# Altium PCB Layout.PcbDoc
Units mm, origin at the board's own origin, x right, y up, seen from the top; angles counter-clockwise.
Board outline 99.27 x 99.28 mm, 2 copper layers (Top Layer, Bottom Layer); 55 components, 56 nets, 260 pads, 29 vias.
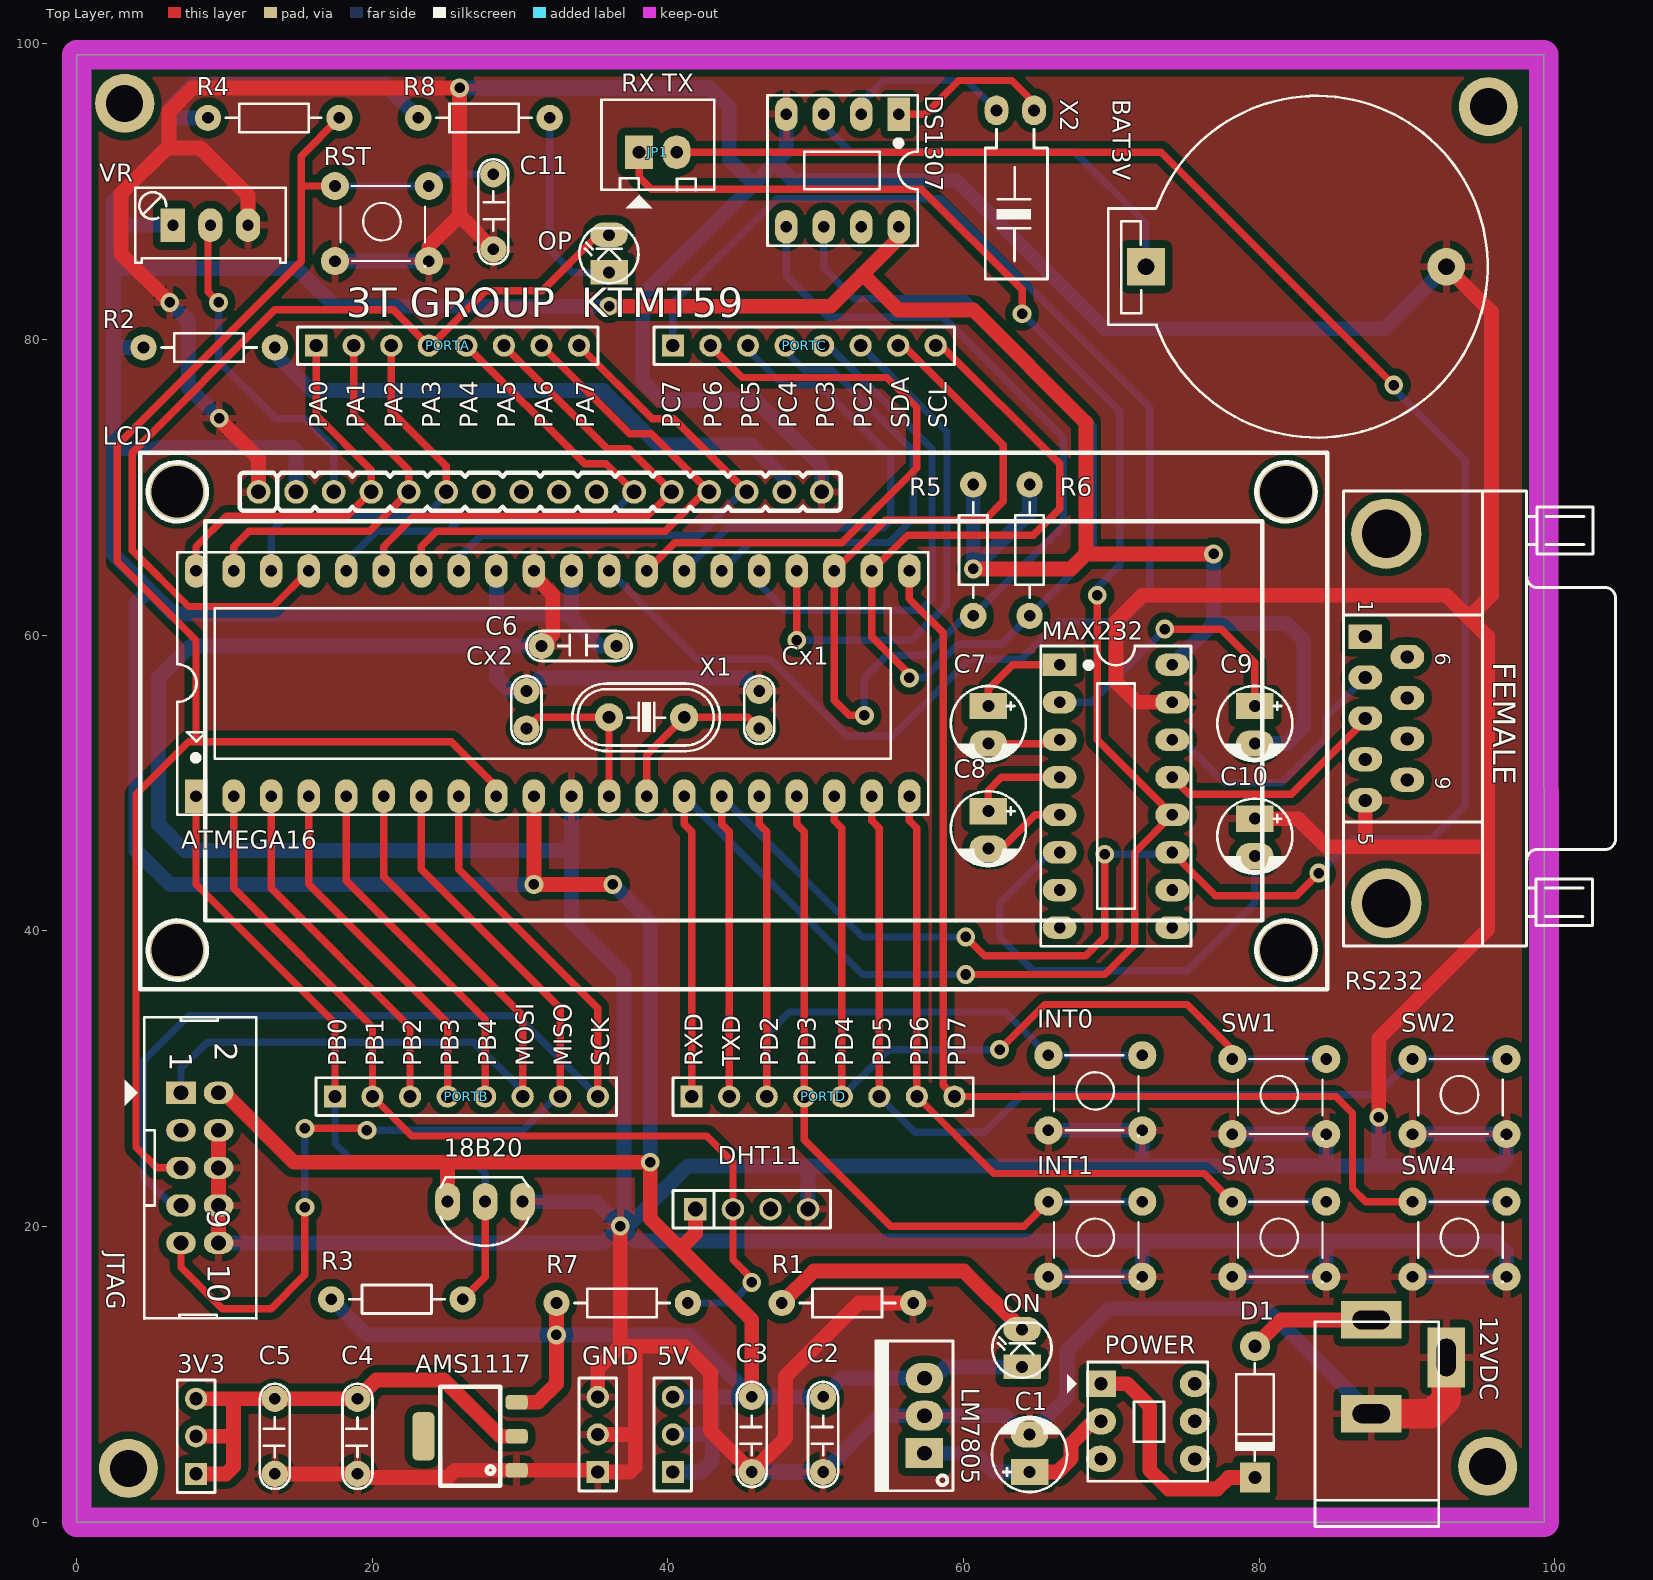
[diagram p0: Top Layer view]
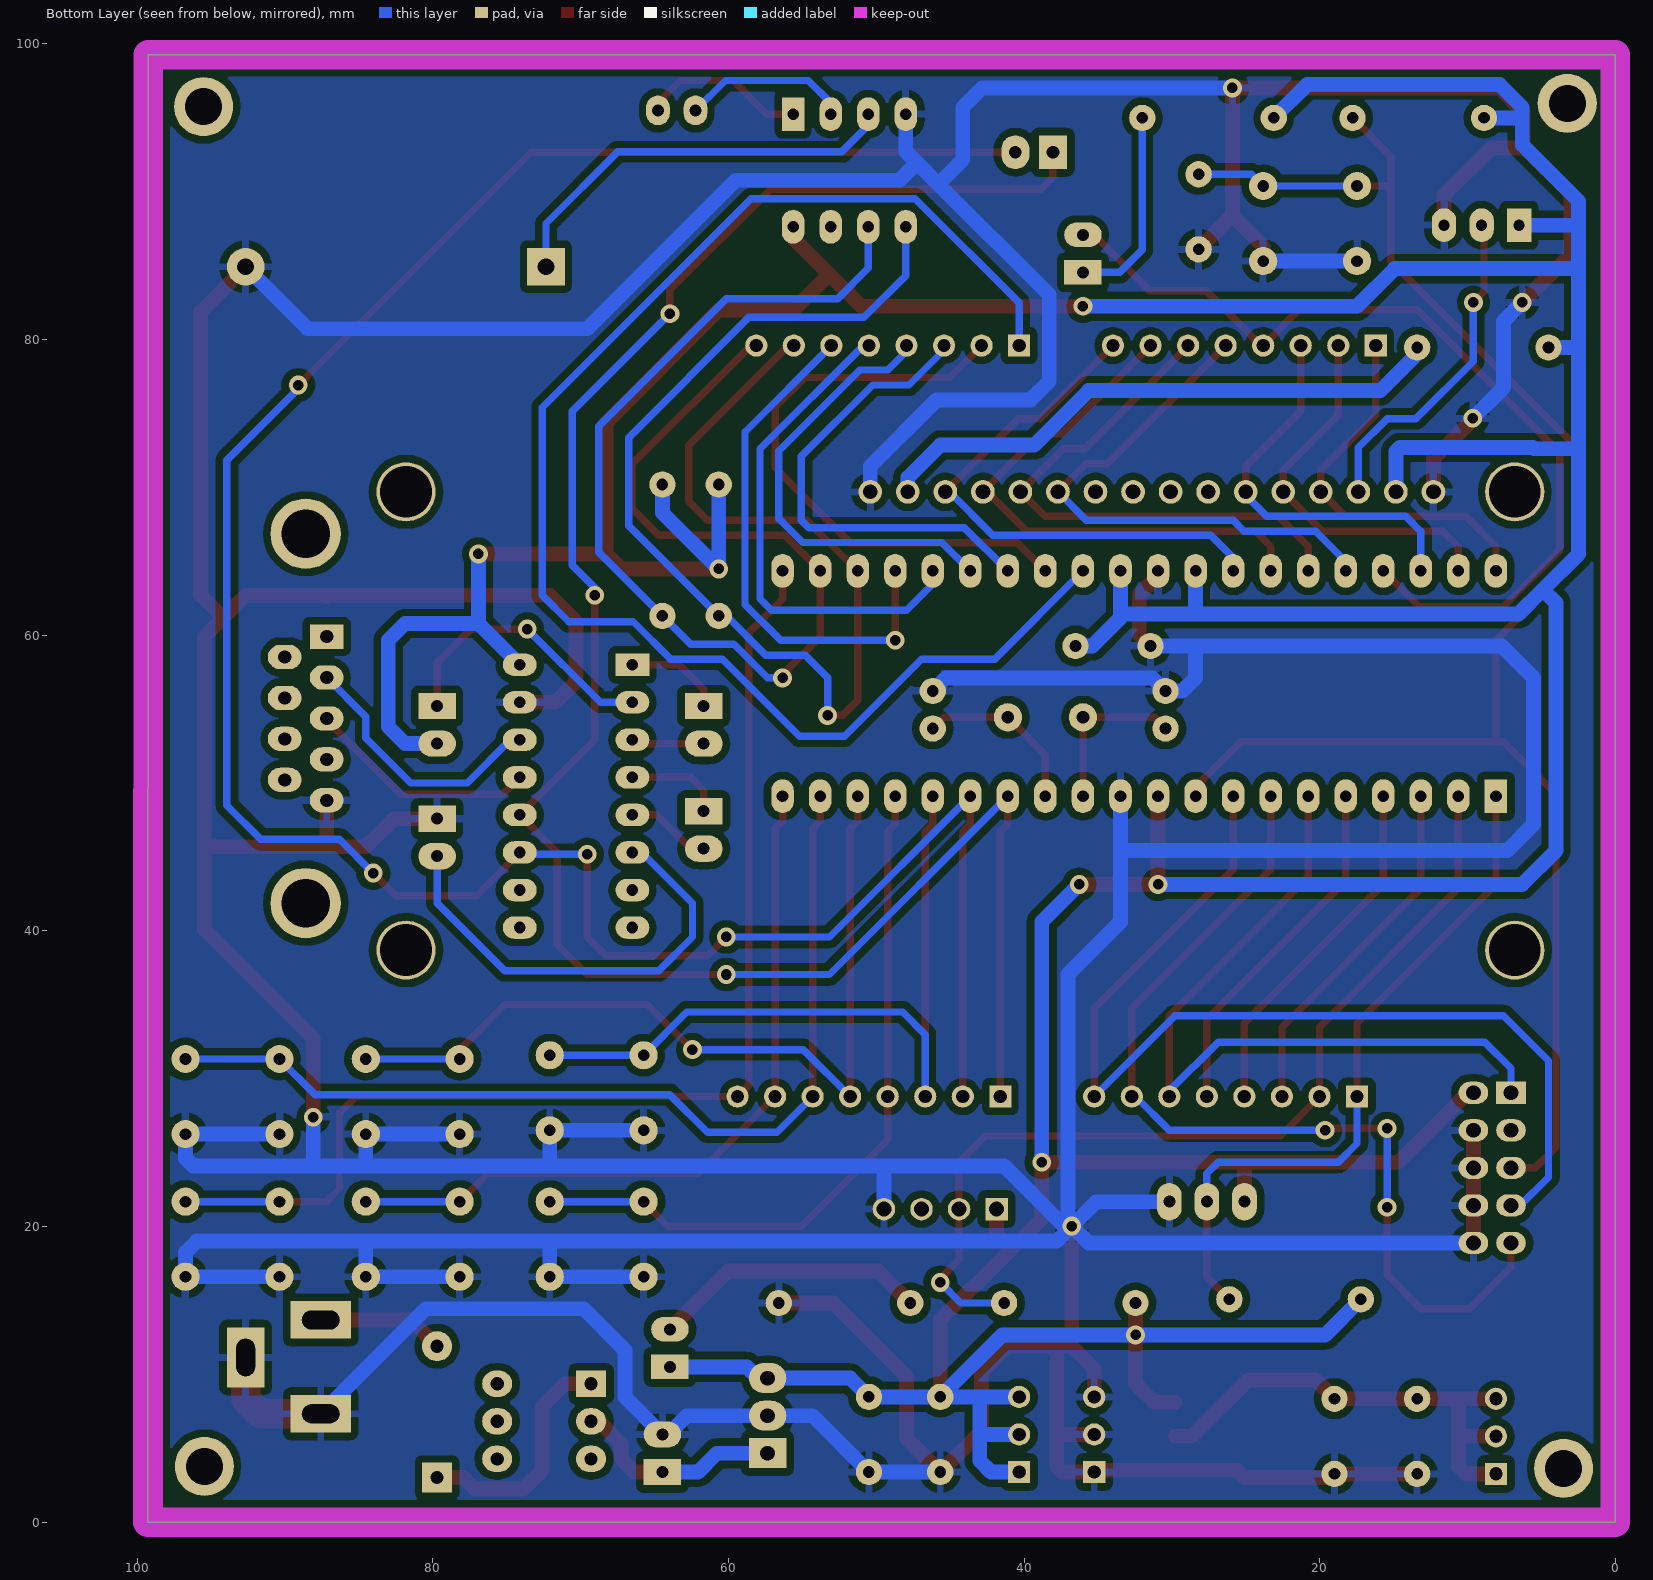
[diagram p1: Bottom Layer view, seen from below]
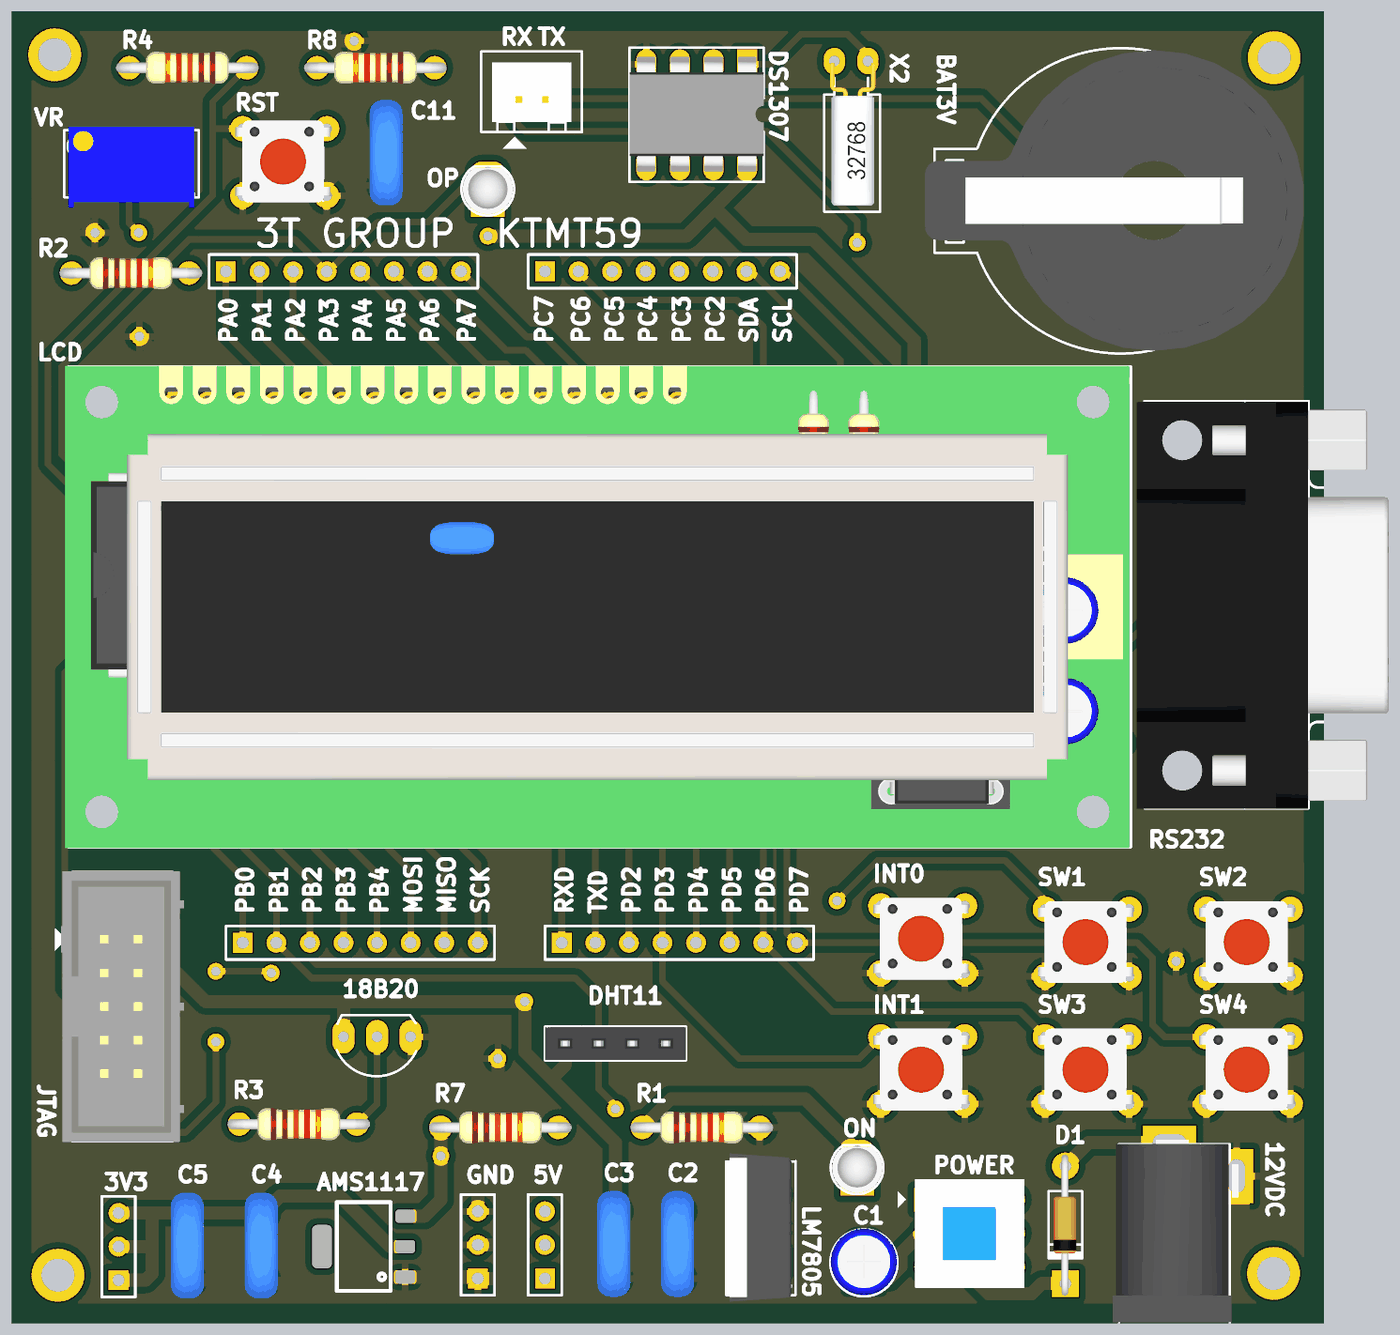
[diagram p2: 3D render of the assembled board from above, using the file's embedded part models]

## Layer stack, top to bottom
Top Solder: solder mask 0.0102, Solder Resist, Dk 3.5
Top Layer: signal copper 0.0356
Dielectric 1: dielectric 0.32, FR-4, Dk 4.8
Bottom Layer: signal copper 0.0356
Bottom Solder: solder mask 0.0102, Solder Resist, Dk 3.5

## Board outline
0,0 0,99.28 99.258,99.28 99.269,0

## Design rules (kind name [scope] priority, off if disabled: settings)
Clearance [All] p1: gap=0.5 ignorepadtopadclearanceinfootprint=FALSE
PlaneClearance [All] p1: clearance=0.5
PlaneConnect [All] p1: planeconnectstyle=Relief reliefexpansion=0.5 reliefentries=4 reliefconductorwidth=0.5 reliefairgap=0.5
PolygonConnect [All] p1: connectstyle=Relief reliefconductorwidth=0.5 reliefentries=4 polygonreliefangle="90 Angle" airgapwidth=0.5
RoutingVias [All] p1: holewidth=0.711 width=1.27 viastyle="Through Hole" minholewidth=0.711 minwidth=1.27 maxholewidth=0.711 maxwidth=1.27
SolderMaskExpansion [All] p1: expansion=0.102
Width Net_Signal [InNetClass('Net_Signal')] p1: maxlimit=1 minlimit=0.5 preferedwidth=0.5
Width Net_Power [InNetClass('Net_Power')] p2: maxlimit=2 minlimit=0.5 preferedwidth=1
28 further rules are at their usual default settings.

## Classes and differential pairs
net class Net_Signal: MISO MOSI Net12VDC_1 NetBAT3V_1 NetC1_1 NetC7_1 NetC7_2 NetC8_1 NetC8_2 NetC9_1 NetC10_2 NetD1_2 NetDS1307_1 NetDS1307_2 NetLCD_3 NetLCD_15 NetMAX232_13 NetMAX232_14 NetON_2 NetOP_1 PA0 PA1 PA2 PA3 PA4 PA5 PA6 PA7 PB0 PB1 PB2 PB3 PB4 PC2 PC3 PC4 PC5 PC6 PC7 PD2 PD3 PD4 PD5 PD6 PD7 RESET RXD SCK SCL SDA TXD XTAL1 XTAL2
net class Net_Power: 3V3 GND VCC

## Components (designator, comment, footprint, x,y, rotation, side; value= is the part's Value field where it differs from the comment)
3V3 "Header 3" HDR1X3 8.08,3.268 r90 top
5V "Header 3" HDR1X3 40.338,3.395 r90 top
12VDC "Jac DC" DC-IN 90.122,10.507 r90 top
18B20 "DS18B20" DS18S20 27.638,21.683 r180 top
AMS1117 "AMS1117-3V3" AMS1117-3.3V 26.622,5.808 r180 top
ATMEGA16 "ATMEL 16" DIP40/W0.6 8.08,49.115 r0 top value="Atmega 16L"
BAT3V "PIN 3V" PIN3V 72.342,84.929 r0 top (schematic designator BT1)
C1 "100uF" CP1/2 64.468,3.395 r90 top value=10uF/50V
C2 "106" CN2 50.498,3.395 r90 top value=0.1uF
C3 "104" CN2 45.672,3.395 r90 top value=0.1uF
C4 "106" CN2 19.002,3.268 r90 top value=0.1uF
C5 "104" CN2 13.414,3.268 r90 top value=0.1uF
C6 "104" CN2 31.448,59.275 r0 top value=0,1uF/300V
C7 "1uF" CP1/2 61.674,55.211 r270 top value=10uF/50V
C8 "1uF" CP1/2 61.674,48.099 r270 top value=10uF/50V
C9 "1uF" CP1/2 79.708,55.211 r270 top value=10uF/50V
C10 "1uF" CP1/2 79.708,47.591 r270 top value=10uF/50V
C11 "104" CN2 28.194,91.186 r270 top value=0.1uF
Cx1 "22pF" CN1 46.18,56.227 r270 top value=33pF
Cx2 "22pF" CN1 30.432,56.227 r270 top value=33pF
D1 "1N4007" D1A 79.708,11.904 r90 top
DHT11 "DHT11" JP4-C1T 41.862,21.175 r0 top
DS1307 "DS1307" DIP8/W0.3 55.626,95.25 r180 top
GND "Header 3" HDR1X3 35.258,3.395 r90 top
INT0 "SW" SW4 65.738,31.589 r0 top value="Button chip 4 pin"
INT1 "SW" SW4 65.738,21.683 r0 top value="Button chip 4 pin"
JP1 "JP2" CON2 38.052,92.676 r0 top value="Connector 2"
JTAG "Header 5x2" Hed2X5 7.064,29.049 r270 top
LCD "LCD 16x2A" LCD16x2 12.31,69.701 r0 top value=LCD16x2A
LM7805 "LM7805" QTO-220 57.356,4.665 r90 top
MAX232 "MAX232" DIP16/W0.3 66.5,58.005 r270 top
ON "LED" LED-3 63.96,10.507 r90 top value="LED 3 ly Single Colour"
OP "LED" LED-3 36.02,84.548 r90 top value="LED 3 ly Single Colour"
PORTA "Header 8" HDR1X8 16.208,79.595 r0 top
PORTB "Header 8" HDR1X8 17.478,28.795 r0 top
PORTC "Header 8" HDR1X8 40.338,79.595 r0 top
PORTD "Header 8" HDR1X8 41.608,28.795 r0 top
POWER "SW6S" SW6 69.294,9.364 r0 top value=SW6 (schematic designator PWR)
R1 "220" R1/4W 56.594,14.825 r180 top value="R1/4W - 1K"
R2 "220" R1/4W 13.414,79.468 r180 top value="R1/4W - 1K"
R3 "10k" R1/4W 26.114,15.079 r180 top value="R1/4W - 1K"
R4 "100k" R1/4W 8.89,94.996 r0 top value="R1/4W - 1K"
R5 "10k" R1/4W 60.658,61.307 r90 top value="R1/4W - 1K"
R6 "10k" R1/4W 64.468,61.307 r90 top value="R1/4W - 1K"
R7 "10k" R1/4W 41.354,14.825 r180 top value="R1/4W - 1K" (schematic designator R17)
R8 "330" R1/4W 23.114,94.996 r0 top value="R1/4W - 1K"
RS232 "RS232" "DSB 9-F" 88.598,54.371 r270 top
RST "SW" SW4 17.478,90.39 r0 top value="Button chip 4 pin"
SW1 "SW" SW4 78.184,31.335 r0 top value="Button chip 4 pin"
SW2 "SW" SW4 90.376,31.335 r0 top value="Button chip 4 pin"
SW3 "SW" SW4 78.184,21.683 r0 top value="Button chip 4 pin"
SW4 "SW" SW4 90.376,21.683 r0 top value="Button chip 4 pin"
VR "10K" VR1 6.514,87.74 r0 top value="VR 10K"
X1 "16MHz" XT2 38.56,54.449 r0 top value=4Mhz
X2 "32,768 Khz" XT32-2 64.77,95.504 r270 top value=32,768khz

## Footprints (in the part's own frame and the unit in brackets; to place one, negate y for a bottom-side part, rotate by r counter-clockwise, add the part's x,y. Pads: shape width x height; smd on the part's side, far side on the other; paste and mask are expansions set on the pad)
AMS1117-3.3V [mm] "SOT223, 4-Leads, Body 6.7x7.3mm (max), Pitch 2.30mm, IPC Medium Density"
  rrect50% 1.5x1 smd: 1(-3.15,2.3) 2(-3.15,0) 3(-3.15,-2.3)
  rrect50% 1.5x3.28 smd: 4(3.15,0)
  silkscreen extent -2.03,-3.35 2.03,3.35
CN1 [mil]
  round 70 hole 31: 1(0,0) 2(100,0)
  silkscreen extent -40,-40 141,40, body extent -60,-30 170,37, height 265
CN2 [mil]
  round 70 hole 31: 1(0,0) 2(200,0)
  silkscreen extent -40,-40 240,40, body extent -54,-44 260,55, height 407
CON2 [mil] "CON2"
  rect 75x90 hole 34: 1(0,0)
  oval 75x90 hole 34: 2(100,0)
  silkscreen extent -100,-150 200,140, body extent -68,-70 168,107, height 236
CP1/2 [mil] "Tu hoa < 22uF/16>50V"
  rect 70x100 hole 32: 1(0,0)
  oval 70x100 hole 32: 2(100,0)
  silkscreen extent -53,-100 146,100, body extent -49,-99 149,99, height 287
D1A [mil] "Diode 1A, W 100mil, L 350mil"
  round 80 hole 35: 1(0,0)
  rect 80x80 hole 35: 2(-350,0)
  silkscreen extent -305,-50 -45,50, body extent -386,-33 34,36, height 84
DC-IN [mil] "Jac DC input"
  rect 100x160 hole 50 slot 100 at 90 deg: 1(125,100) 2(-125,100)
  rect 160x100 hole 50 slot 100 at 0 deg: 3(25,-100)
  silkscreen extent -425,-80 120,250, body extent -410,-105 134,269, height 434
DIP8/W0.3 [mil] "8 PIN, W 300mil, Pin to pin 100mil"
  rect 60x90 hole 31: 1(0,0)
  oval 60x90 hole 31: 2(100,0) 3(200,0) 4(300,0) 5(300,300) 6(200,300) 7(100,300) 8(0,300)
  silkscreen extent -50,-50 350,350, body extent -50,-40 350,336, height 201
DIP16/W0.3 [mil] "16 PIN, W 300mil, Pin to pin 100mil"
  rect 60x90 hole 31: 1(0,0)
  oval 60x90 hole 31: 2(100,0) 3(200,0) 4(300,0) 5(400,0) 6(500,0) 7(600,0) 8(700,0) 9(700,300) 10(600,300) 11(500,300) 12(400,300) 13(300,300) 14(200,300) 15(100,300) 16(0,300)
  silkscreen extent -50,-50 750,350, body extent -52,-57 752,356, height 299
DIP40/W0.6 [mil] "40 PIN, W 600mil, Pin to pin 100mil"
  rect 60x90 hole 31: 1(0,0)
  oval 60x90 hole 31: 2(100,0) 3(200,0) 4(300,0) 5(400,0) 6(500,0) 7(600,0) 8(700,0) 9(800,0) 10(900,0) 11(1000,0) 12(1100,0) 13(1200,0) 14(1300,0) 15(1400,0) 16(1500,0) 17(1600,0) 18(1700,0) 19(1800,0) 20(1900,0) 21(1900,600) 22(1800,600) 23(1700,600) 24(1600,600) 25(1500,600) 26(1400,600) 27(1300,600) 28(1200,600) 29(1100,600) 30(1000,600) 31(900,600) 32(800,600) 33(700,600) 34(600,600) 35(500,600) 36(400,600) 37(300,600) 38(200,600) 39(100,600) 40(0,600)
  silkscreen extent -50,-50 1950,650, body extent -82,-10 1982,600, height 224
DS18S20 [mil] "TO-92"
  oval 66x100 hole 32: 3(100,0) 4(0,0) 5(-100,0)
  silkscreen extent -117,-65 120,118
"DSB 9-F" [mil] "COM FMALE - D Subminiature; 9 Position; Right Angle; Pitch 1.385 mm"
  rect 65x90 hole 35: 1(-218.11,-55.91)
  oval 65x90 hole 35: 2(-109.05,-55.91) 3(0,-55.91) 4(109.05,-55.91) 5(218.11,-55.91) 6(-163.58,55.91) 7(-54.53,55.91) 8(54.53,55.91) 9(163.58,55.91)
  round 187.4 hole 128.35: 10(-491.93,0) 11(491.93,0)
  silkscreen extent -606,-114 606,610, body extent -604,-138 608,613, height 495
HDR1X3 [mm] "Connector; Header; 3 Position"
  rect 1.5x1.5 hole 0.9: 1(0,0)
  round 1.5 hole 0.9: 2(2.54,0) 3(5.08,0)
  silkscreen extent -1.27,-1.27 6.35,1.27
HDR1X8 [mm] "Connector; Header; 8 Position"
  rect 1.5x1.5 hole 0.9: 1(0,0)
  round 1.5 hole 0.9: 2(2.54,0) 3(5.08,0) 4(7.62,0) 5(10.16,0) 6(12.7,0) 7(15.24,0) 8(17.78,0)
  silkscreen extent -1.27,-1.27 19.05,1.27
Hed2X5 [mm] "Header 10x2,20 pin, connecter"
  rect 1.5x2 hole 1: 1(0,0)
  oval 1.5x2 hole 1: 2(0,2.54) 3(2.54,0) 4(2.54,2.54) 5(5.08,0) 6(5.08,2.54) 7(7.62,0) 8(7.62,2.54) 9(10.16,0) 10(10.16,2.54)
  silkscreen extent -5.1,-3.81 15.29,5.11, body extent -5.17,-3.33 15.33,5.97, height 8.82
JP4-C1T [mm] "4 row, straight, gold plating"
  rect 1.52x1.52 hole 1.02: 1(0,0)
  round 1.52 hole 1.02: 2(2.54,0) 3(5.08,0) 4(7.62,0)
  silkscreen extent -1.52,-1.27 9.14,1.27, body extent -1.52,-1.25 9.14,1.25, height 8.51
LCD16x2 [mm] "LCD 16x2, 36.3mmx80.3mm"
  round 1.6 hole 1 mask+0.1: 1(0,0) 2(2.54,0) 3(5.08,0) 4(7.62,0) 5(10.16,0) 6(12.7,0) 7(15.24,0) 8(17.78,0) 9(20.32,0) 10(22.86,0) 11(25.4,0) 12(27.94,0) 13(30.48,0) 14(33.02,0) 15(35.56,0) 16(38.1,0)
  round 4 hole 3.5: Hole_0(-5.5,0) Hole_1(-5.5,-31) Hole_3(69.5,-31) Hole_4(69.5,0)
  silkscreen extent -8,-33.65 72.3,2.65, body extent -8.25,-33.75 72.25,2.75, height 10.52
LED-3 [mil] "LED 2 PIN, 3ly Only colour"
  rect 65x100 hole 32: 1(0,0)
  oval 65x100 hole 32: 2(100,0)
  silkscreen extent -29,-78 118,79, body extent -25,-75 113,75, height 217
PIN3V [mil] "Socket PIN 3V"
  rect 100x100 hole 45: 1(0,0)
  round 100 hole 45: 2(800,0)
  silkscreen extent -100,-455 910,455, body extent -128,-447 1002,449, height 278
QTO-220 [mil] "TO-220 - 1-2-3"
  rect 80x100 hole 39: 1(0,0)
  oval 80x100 hole 39: 2(100,0) 3(200,0)
  silkscreen extent -100,-76 300,130, body extent -119,-64 322,121, height 755
R1/4W [mil] "R 1/4W, 2 Pin, 350mil"
  round 70 hole 31: 1(0,0) 2(350,0)
  silkscreen extent 48,-38 302,38, body extent -40,-47 386,47, height 111
SW4 [mil] "SW button 4pin, 250 x250 mil"
  round 75 hole 31: 1(0,0) 2(250,-200) 3(250,0) 4(0,-200)
  silkscreen extent 15,-215 240,0, body extent -36,-220 276,24, height 276
SW6 [mil] "SW DTDP - 6Pin 260x300x300 mil"
  rect 80x70 hole 35: 1(0,0)
  oval 80x70 hole 35: 2(0,-100) 3(0,-200) 4(250,-200) 5(250,-100) 6(250,0)
  silkscreen extent -90,-260 285,58, body extent -33,-259 281,55, height 532
VR1 [mil] "Variable Resistor"
  rect 65x90 hole 30: 1(0,0)
  oval 65x90 hole 30: 2(100,0) 3(200,0)
  silkscreen extent -100,-100 301,100, body extent -88,-130 288,110, height 455
XT2 [mil] "Footpin for Crystal 2 pin"
  round 75 hole 34: 1(-100,0) 2(100,0)
  silkscreen extent -198,-90 195,90, body extent -233,-93 213,90, height 138
XT32-2 [mm] "Crystal 32k, 2 pin, real timer for DS1307"
  oval 2x1.6 hole 0.813: 1(0,0) 2(0,-2.54)
  silkscreen extent 1.27,-3.3 11.4,0.91, body extent 0.15,-2.87 10.92,0.58, height 3.4

## Part data
3V3 5V GND: library part Hed3, "Header 3 (Green)"
12VDC: library part DCIN, "Jac DC input"
18B20: library part DS18S20, "High Precision  1-Wire® Digital Thermometer"
AMS1117: "Linear Voltage Regulator 3.3V 1A 15V Max SOT-223", ComponentLink1Description=Datasheet, ComponentLink1URL="D:\Dropbox\Datasheets\Power Management ICs\Linear Regulators\AMS1117.pdf", Unit Price=0.2000
ATMEGA16: library part ATmega16A-PU, "8-Bit AVR Microcontroller with 16K Bytes of In-System Programmable Flash Memory"
BAT3V: "Battery 3VDC"
C1 C7 C8 C9 C10: library part CP1, "Cap P  0,1uF < 22uF , 16 - 50V", Description 1="10 => 220uF/6,3V/10V - 10uF => 100uF/16V", Description 2="0,1uF => 33uF/50V - 10uF => 22uF/63V", Description 3="0,47uF => 10uF/100V"
C2 C3 C4 C5 C11: library part CN2, "Cap np 104 => 105pF"
C6: library part CN, Designed by=VanDungEvn
Cx1 Cx2: library part CN0, "Cremic For Xtal 1pF => 100pF"
D1: library part D1A, "Diode 1A"
DHT11: Manufacturer="Würth Elektronik eiSos GmbH", partNo=613004143121, ComponentLink1 Description=Manufacturer, ComponentLink1URL=http://www.we-online.com, ComponentLink2 Description=Datasheet, ComponentLink2URL=http://katalog.we-online.de/em/datasheet/6130xx143121.pdf, Created by="Karrer Zheng", Created Date="29 March 2013", NoPins=04
DS1307: "Real Timer Serial"
INT0 INT1 RST SW1 SW2 SW3 SW4: library part SW4, "Switch button 4 pin"
JP1: library part Con2, "Connector 2"
JTAG: library part HED5x2
LCD: library part LCD16x2A, "LCD dipslay 16 char, 2 line"
LM7805: library part LM78xx, "On ap +, from + 5 to + 24VDC", =LM7808
MAX232: "Dual EIA-232 Driver/Receiver"
ON OP: "LED Single colour Green and Red"
PORTA PORTB PORTC PORTD: library part HED8V, "Header 8 Vit Broad"
POWER: "SW-DTDP - 6 Pin"
R1 R2 R3 R4 R5 R6 R7 R8: library part R1/4W, "Resistor 1/4W"
RS232: library part COM
VR: library part VR, "Var Resistor"
X1: library part XT2, "Crystal For all Crystal 2pin."
X2: library part XT32k, "Crystal 32,768kHz for timer real"

## Free pads (board coordinates)
  round 4 hole 2.5: 1(3.254,95.978) 2(95.504,95.758) 3(3.5,3.64) 4(95.456,3.776)

## Via types
v1: diameter 1.27, hole 0.711, Top Layer to Bottom Layer, 29 vias

## Nets (pads, with @x,y where several pads share a name; then routed paths per layer and width w, separated by ;. In a path a pad name is that pad's centre, name@x,y a point inside that pad or via, vN(x,y) a via of type N, cw(c..) or ccw(c..) an arc to the next point about the centre after c; other vN are vias at no path point)
3V3: 3V3.1 3V3.2 3V3.3 AMS1117.2 C4.2 C5.2 | length 33.7
  Top Layer w1: 3V3.1 10.112,3.268 10.62,3.776 10.62,5.808 ; 3V3.2 10.62,5.808 ; 3V3.3 10.62,8.348 ; AMS1117.2 28.654,5.808 24.844,9.618 20.272,9.618 C4.2 C5.2 10.62,8.348 ; 10.62,5.808 10.62,8.348
GND: 12VDC.2 12VDC.3 18B20.5 AMS1117.1 ATMEGA16.11 ATMEGA16.31 BAT3V.2 C1.2 C2.1 C3.1 C4.1 C5.1 C6.1 C10.1 C11.2 Cx1.1 Cx2.1 DHT11.4 DS1307.4 GND.1 GND.2 GND.3 INT0.2 INT0.4 INT1.2 INT1.4 JTAG.4 JTAG.6 JTAG.8 JTAG.10 LCD.1 LCD.16 LM7805.2 MAX232.15 R1.1 RS232.5 RST.2 RST.4 SW1.2 SW1.4 SW2.2 SW2.4 SW3.2 SW3.4 SW4.2 SW4.4 VR.3 | length 800.8
  Top Layer w1: 6.254,92.964 8.382,92.964 11.594,89.752 VR.3 VR.3@11.382,87.952 ; v1(6.302,82.516) 3,85.818 3,89.868 6.254,93.122 6.254,95.422 7.86,97.028 v1(25.908,97.028) 25.908,88.392 ; JTAG.10 JTAG.8 JTAG.6 JTAG.4 ; v1(9.652,74.676) 9.652,74.594 12.31,71.936 LCD.1 ; C5.1 C4.1 19.256,3.014 25.098,3.014 25.592,3.508 AMS1117.1 35.145,3.508 GND.1 37.417,3.395 37.798,3.776 37.798,5.808 ; RST.2 23.828,86.312 25.908,88.392 ; C11.2 25.908,88.392 ; ATMEGA16.31 30.94,64.022 32.21,62.752 32.21,60.037 C6.1 ; GND.2 37.671,5.935 37.798,5.808 ; GND.3 35.258,10.38 36.782,11.904 ; v1(36.782,20.032) 36.782,11.904 ; R1.1 52.911,14.825 47.958,9.872 47.958,5.681 C3.1 42.878,6.189 42.878,10.126 41.1,11.904 37.798,11.904 ; MAX232.15 71.707,55.465 70.31,56.862 70.31,60.926 72.088,62.704 87.074,62.704 ; C10.1 82.629,47.591 84.534,45.686 87.074,45.686 ; RS232.5 87.178,45.79 87.074,45.686 ; 87.178,62.6 87.074,62.704 ; v1(88.09,27.398) 88.09,32.732 95.456,40.098 95.456,45.686 ; BAT3V.2 95.71,81.881 95.71,62.704 94.186,61.18 ; 36.782,11.904 37.798,11.904 ; 37.798,5.808 37.798,11.904 ; 87.074,45.686 95.456,45.686 ; 87.074,62.704 92.662,62.704 94.186,61.18 ; 94.186,61.18 95.456,59.91 95.456,45.686
  Top Layer w2: 12VDC.2 91.646,7.332 92.662,8.348 12VDC.3
  Bottom Layer w1: v1(6.302,82.516) 7.572,81.246 7.572,76.756 v1(9.652,74.676) ; JTAG.10 35.639,18.889 v1(36.782,20.032) ; RST.4 RST.2 ; v1(25.908,97.028) 42.844,97.028 44.148,95.724 44.148,92.168 45.799,90.517 ; 18B20.5 35.131,21.683 v1(36.782,20.032) ; C6.1@31.448,58.894 C6.1 28.4,59.275 ; ATMEGA16.11 33.48,45.432 ; C3.1 C2.1 54.308,7.205 LM7805.2 62.817,7.205 64.087,5.935 C1.2 67.008,8.475 67.008,11.65 69.802,14.444 80.47,14.444 12VDC.2 ; Cx1.1 45.291,57.116 31.321,57.116 Cx2.1 29.289,56.227 28.4,57.116 28.4,59.275 ; DS1307.4 48.006,92.724 47.244,91.962 ; DHT11.4 49.482,24.096 ; LCD.16@50.525,69.816 LCD.16 50.41,71.428 45.926,75.912 39.576,75.912 38.306,77.182 38.306,83.024 45.799,90.517 ; INT1.4 INT1.2 72.088,19.016 ; INT0.4 INT0.2 72.088,24.096 ; SW3.4 SW3.2 84.534,18.762 84.28,19.016 ; SW1.4 SW1.2 84.534,24.096 ; v1(88.09,27.398) 88.09,24.096 ; SW4.4 SW4.2 96.726,18.254 95.964,19.016 84.28,19.016 ; SW2.4 SW2.2 96.726,24.604 96.218,24.096 88.09,24.096 ; BAT3V.2 88.471,80.738 69.548,80.738 59.513,90.773 48.433,90.773 47.244,91.962 ; 28.4,59.275 7.699,59.275 5.54,57.116 5.54,47.21 7.318,45.432 33.48,45.432 ; 33.48,45.432 33.48,40.606 37.036,37.05 37.036,20.286 v1(36.782,20.032) ; v1(36.782,20.032) 37.29,20.032 41.354,24.096 49.482,24.096 ; v1(36.782,20.032) 37.798,19.016 72.088,19.016 ; 45.799,90.517 47.244,91.962 ; 49.482,24.096 72.088,24.096 ; 72.088,19.016 84.28,19.016 ; 72.088,24.096 84.534,24.096 ; 84.534,24.096 88.09,24.096
MISO: ATMEGA16.7 JTAG.9 PORTB.7 | length 64.5
  Top Layer w0.5: JTAG.9 7.064,17.238 9.858,14.444 13.16,14.444 15.446,16.73 v1(15.446,21.302) ; v1(15.446,26.636) 19.51,26.636 v1(19.637,26.509) ; ATMEGA16.7 23.32,44.162 32.718,34.764 PORTB.7
  Bottom Layer w0.5: v1(15.446,21.302) v1(15.446,26.636) ; v1(19.637,26.509) 30.178,26.509 32.464,28.795 PORTB.7
MOSI: ATMEGA16.6 JTAG.1 PORTB.6 | length 51.5
  Top Layer w0.5: ATMEGA16.6 20.78,43.654 30.178,34.256 PORTB.6
  Bottom Layer w0.5: JTAG.1 7.064,30.7 8.842,32.478 26.876,32.478 30.178,29.176 PORTB.6
Net12VDC_1: 12VDC.1 D1.1 | length 8.6
  Top Layer w1: D1.1 81.486,13.682 12VDC.1
NetBAT3V_1: BAT3V.1 DS1307.3 | length 28.2
  Bottom Layer w0.5: DS1307.3 50.546,94.488 52.324,92.71 67.482,92.71 72.342,87.85 BAT3V.1
NetC1_1: C1.1 LM7805.1 POWER.2 | length 14.5
  Top Layer w1: C1.1 66.373,3.395 67.278,4.3 67.278,5.316 68.786,6.824 POWER.2
  Bottom Layer w1: LM7805.1 60.785,4.665 62.055,3.395 C1.1
NetC7_1: C7.1 MAX232.1 | length 6.7
  Top Layer w0.5: C7.1 61.674,56.354 63.325,58.005 MAX232.1
NetC7_2: C7.2 MAX232.3 | length 4.9
  Top Layer w0.5: C7.2 66.246,52.671 MAX232.3
NetC8_1: C8.1 MAX232.4 | length 6.6
  Top Layer w0.5: C8.1 61.674,49.496 62.563,50.385 MAX232.4
NetC8_2: C8.2 MAX232.5 | length 5.8
  Top Layer w0.5: C8.2 62.563,45.559 64.849,47.845 MAX232.5
NetC9_1: C9.1 MAX232.2 | length 19.1
  Top Layer w0.5: v1(73.612,60.418) 77.422,60.418 79.708,58.132 C9.1
  Bottom Layer w0.5: MAX232.2 68.659,55.465 v1(73.612,60.418)
NetC10_2: C10.2 MAX232.6 | length 31.1
  Bottom Layer w0.5: MAX232.6 65.865,45.305 62.436,41.876 62.436,39.59 64.722,37.304 75.136,37.304 79.708,41.876 C10.2
NetD1_2: D1.2 POWER.1 | length 16.2
  Top Layer w1: POWER.1 71.072,9.364 72.596,7.84 72.596,3.522 73.866,2.252 77.168,2.252 77.93,3.014 D1.2
NetDS1307_1: DS1307.1 X2.1 | length 11.2
  Top Layer w0.5: DS1307.1 57.404,95.25 59.684,97.53 63.252,97.53 64.77,96.012 X2.1
NetDS1307_2: DS1307.2 X2.2 | length 11.4
  Bottom Layer w0.5: DS1307.2 53.086,96.012 54.604,97.53 60.204,97.53 X2.2
NetLCD_3: LCD.3 VR.2 | length 22.8
  Top Layer w0.5: VR.2 8.89,87.576 8.89,83.23 v1(9.604,82.516)
  Bottom Layer w0.5: v1(9.604,82.516) 9.604,78.534 13.496,74.642 15.446,74.642 17.39,72.698 LCD.3
NetLCD_15: LCD.15 R2.1 | length 39.3
  Bottom Layer w1: R2.1 13.414,79.042 15.909,76.547 35.639,76.547 39.322,72.864 45.672,72.864 47.87,70.666 LCD.15
NetMAX232_13: MAX232.13 RS232.3 | length 15.6
  Top Layer w0.5: MAX232.13 75.263,49.242 82.176,49.242 RS232.3@87.178,54.244
NetMAX232_14: MAX232.14 RS232.2 | length 18.1
  Bottom Layer w0.5: MAX232.14 74.755,52.925 77.676,50.004 81.486,50.004 84.534,53.052 84.534,54.497 RS232.2
NetON_2: ON.2 R1.2 | length 18.8
  Top Layer w1: R1.2 49.863,16.984 60.023,16.984 ON.2
NetOP_1: OP.1 R8.2 | length 13.6
  Bottom Layer w0.5: R8.2 32.004,86.072 33.528,84.548 OP.1
PA0: ATMEGA16.40 LCD.4 PORTA.1 | length 26.5
  Top Layer w0.5: ATMEGA16.40 8.08,66.006 10.112,68.038 18.267,68.038 LCD.4 19.93,71.174 16.208,74.896 PORTA.1
PA1: ATMEGA16.39 LCD.5 PORTA.2 | length 26.5
  Top Layer w0.5: ATMEGA16.39 10.62,66.006 11.636,67.022 19.791,67.022 LCD.5 22.47,71.174 18.748,74.896 PORTA.2
PA2: ATMEGA16.38 LCD.6 PORTA.3 | length 27.2
  Top Layer w0.5: PORTA.3 21.288,75.15 25.01,71.428 LCD.6
  Bottom Layer w0.5: ATMEGA16.38 13.16,67.022 14.176,68.038 23.574,68.038 25.01,69.474 LCD.6
PA3: ATMEGA16.37 OP.2 PORTA.4 | length 61.5
  Top Layer w0.5: ATMEGA16.37 13.287,61.942 7.572,61.942 3.762,65.752 3.762,72.356 13.414,82.008 21.415,82.008 PORTA.4 23.969,79.595 27.686,83.312 31.496,83.312 35.272,87.088 OP.2
PA4: ATMEGA16.36 LCD.11 PORTA.5 | length 37.5
  Top Layer w0.5: PORTA.5 34.369,71.594 35.817,71.594 LCD.11
  Bottom Layer w0.5: ATMEGA16.36 18.24,64.99 20.272,67.022 25.098,67.022 25.86,67.784 35.793,67.784 LCD.11
PA5: ATMEGA16.35 LCD.12 PORTA.6 | length 39
  Top Layer w0.5: ATMEGA16.35 20.78,66.006 22.812,68.038 38.587,68.038 LCD.12 37.341,72.61 35.893,72.61 PORTA.6
  Bottom Layer w0.5: ATMEGA16.35 ATMEGA16.35@20.78,65.244
PA6: ATMEGA16.34 LCD.13 PORTA.7 | length 38.1
  Top Layer w0.5: ATMEGA16.34 23.32,66.006 24.344,67.03 39.832,67.03 42.503,69.701 LCD.13 38.865,73.626 37.417,73.626 PORTA.7
PA7: ATMEGA16.33 LCD.14 PORTA.8 | length 37.6
  Top Layer w0.5: PORTA.8 38.941,74.642 40.389,74.642 LCD.14
  Bottom Layer w0.5: ATMEGA16.33 25.86,65.244 27.384,66.768 42.116,66.768 45.049,69.701 LCD.14
PB0: 18B20.4 ATMEGA16.1 PORTB.1 R3.1 | length 47.5
  Top Layer w0.5: ATMEGA16.1 8.08,43.146 17.478,33.748 PORTB.1 ; R3.1 27.638,16.603 18B20.4
  Bottom Layer w0.5: PORTB.1 17.478,25.62 18.748,24.35 26.876,24.35 27.638,23.588 18B20.4
PB1: ATMEGA16.2 DHT11.2 PORTB.2 R7.1 | length 64
  Top Layer w0.5: ATMEGA16.2 10.62,42.892 20.018,33.494 PORTB.2 22.685,26.128 42.624,26.128 44.402,24.35 DHT11.2 44.402,17.746 45.672,16.476 v1(45.672,16.222)
  Bottom Layer w0.5: R7.1 44.275,14.825 v1(45.672,16.222)
PB2: ATMEGA16.3 PORTB.3 | length 24.2
  Top Layer w0.5: ATMEGA16.3 13.16,42.892 22.558,33.494 PORTB.3
PB3: ATMEGA16.4 PORTB.4 | length 24.2
  Top Layer w0.5: ATMEGA16.4 15.7,43.146 25.098,33.748 PORTB.4
PB4: ATMEGA16.5 PORTB.5 | length 24.2
  Top Layer w0.5: ATMEGA16.5 18.24,43.4 27.638,34.002 PORTB.5
PC2: ATMEGA16.24 PORTC.6 | length 35.8
  Top Layer w0.5: v1(48.72,59.656) ATMEGA16.24
  Bottom Layer w0.5: v1(48.72,59.656) 56.467,59.656 58.88,62.069 58.88,73.753 PORTC.6
PC3: ATMEGA16.25 PORTC.5 | length 34
  Bottom Layer w0.5: ATMEGA16.25 46.18,63.466 47.958,61.688 57.085,61.688 57.864,62.467 57.864,72.61 50.879,79.595 PORTC.5
PC4: ATMEGA16.26 PORTC.4 | length 30.8
  Bottom Layer w0.5: ATMEGA16.26 45.561,66.276 54.976,66.276 56.594,67.894 56.594,72.466 51.116,77.944 49.228,77.944 47.958,79.214 PORTC.4
PC5: ATMEGA16.27 PORTC.3 | length 33
  Bottom Layer w0.5: ATMEGA16.27 41.117,64.355 44.038,67.276 54.562,67.276 55.07,67.784 55.07,72.102 50.244,76.928 47.786,76.928 45.418,79.296 PORTC.3 PORTC.3@45.799,79.595
PC6: ATMEGA16.28 PORTC.2 | length 41.3
  Top Layer w0.5: ATMEGA16.28 38.571,64.355 40.476,66.26 51.768,66.26 56.848,71.34 56.848,75.404 54.816,77.436 45.037,77.436 PORTC.2 PORTC.2@43.259,79.595
PC7: ATMEGA16.29 PORTC.1 | length 101.8
  Bottom Layer w0.5: ATMEGA16.29 41.989,58.386 46.942,58.386 52.149,53.179 55.197,53.179 60.404,58.386 63.915,58.386 66.455,60.926 70.818,60.926 72.596,62.704 72.596,75.404 58.477,89.523 47.38,89.523 40.338,82.481 PORTC.1
PD2: ATMEGA16.16 INT0.1 INT0.3 PORTD.3 | length 52
  Top Layer w0.5: ATMEGA16.16 46.18,47.21 46.688,46.702 PORTD.3
  Bottom Layer w0.5: PORTD.3 46.688,32.986 48.212,34.51 62.817,34.51 INT0.1 INT0.3
PD3: ATMEGA16.17 INT1.1 INT1.3 PORTD.4 | length 49.4
  Top Layer w0.5: ATMEGA16.17 48.72,47.21 49.228,46.702 PORTD.4 49.228,25.874 55.07,20.032 64.087,20.032 INT1.1
  Bottom Layer w0.5: INT1.1 INT1.3
PD4: ATMEGA16.18 PORTD.5 SW1.1 SW1.3 | length 57.8
  Top Layer w0.5: ATMEGA16.18 51.26,47.464 51.768,46.956 PORTD.5 ; v1(62.436,31.97) 65.484,35.018 75.136,35.018 78.184,31.97 SW1.1
  Bottom Layer w0.5: PORTD.5 54.943,31.97 v1(62.436,31.97) ; SW1.1 SW1.3
PD5: ATMEGA16.19 PORTD.6 SW2.1 SW2.3 | length 66
  Top Layer w0.5: ATMEGA16.19 53.8,47.464 54.308,46.956 PORTD.6
  Bottom Layer w0.5: PORTD.6 56.721,26.382 61.42,26.382 63.96,28.922 87.963,28.922 SW2.1 SW2.3
PD6: ATMEGA16.20 PORTD.7 SW3.1 SW3.3 | length 51.2
  Top Layer w0.5: ATMEGA16.20 56.34,47.464 56.848,46.956 PORTD.7 62.055,23.588 76.279,23.588 SW3.1
  Bottom Layer w0.5: SW3.1 SW3.3
PD7: ATMEGA16.21 PORTD.8 SW4.1 SW4.3 | length 80.1
  Top Layer w0.5: ATMEGA16.21 56.34,62.45 58.626,60.164 58.626,29.557 PORTD.8 85.169,28.795 86.312,27.652 86.312,22.572 87.201,21.683 SW4.1
  Bottom Layer w0.5: SW4.1 SW4.3
RESET: ATMEGA16.9 C11.1 JTAG.5 R4.2 RST.1 RST.3 | length 119.2
  Top Layer w0.5: JTAG.5 5.413,23.969 4.016,25.366 4.016,49.242 7.572,52.798 8.08,52.798 ; RST.1 15.226,90.39 15.192,90.424 ; R4.2 15.192,92.408 15.192,90.424 ; ATMEGA16.9 28.4,49.75 25.352,52.798 8.08,52.798 ; 8.08,52.798 8.08,59.656 2.746,64.99 2.746,72.864 15.192,85.31 15.192,90.424
  Bottom Layer w0.5: RST.1 RST.3 24.624,91.186 C11.1
RXD: ATMEGA16.14 JP1.1 MAX232.12 PORTD.1 | length 138.4
  Top Layer w0.5: JP1.1 38.052,90.98 38.862,90.17 57.15,90.17 63.96,83.36 v1(63.96,81.754) ; ATMEGA16.14 41.1,47.21 41.608,46.702 PORTD.1 ; v1(60.15,37.05) 69.548,37.05 71.58,39.082 71.58,45.305 MAX232.12 69.04,52.925 v1(69.04,62.704)
  Bottom Layer w0.5: ATMEGA16.14 53.165,37.05 v1(60.15,37.05) ; v1(63.96,81.754) 70.564,75.15 70.564,64.736 69.04,63.212 v1(69.04,62.704)
SCK: ATMEGA16.8 JTAG.7 PORTB.8 | length 69.7
  Top Layer w0.5: ATMEGA16.8 25.86,44.162 35.258,34.764 PORTB.8
  Bottom Layer w0.5: JTAG.7 6.429,21.429 4.524,23.334 4.524,31.208 7.572,34.256 29.797,34.256 PORTB.8
SCL: ATMEGA16.22 DS1307.6 PORTC.8 R6.1 | length 87.4
  Top Layer w0.5: v1(56.34,57.116) 56.34,57.37 53.8,59.91 ATMEGA16.22 56.213,66.768 64.722,66.768 66.5,68.546 66.5,71.594 58.499,79.595 PORTC.8
  Bottom Layer w0.5: DS1307.6 50.539,87.623 50.539,84.843 52.612,82.77 60.15,82.77 68.786,74.134 68.786,65.625 R6.1 62.547,59.386 59.626,59.386 57.356,57.116 v1(56.34,57.116)
SDA: ATMEGA16.23 DS1307.5 PORTC.7 R5.1 | length 91.1
  Top Layer w0.5: v1(53.292,54.576) 52.276,54.576 51.26,55.592 ATMEGA16.23 52.165,65.26 52.182,65.26 52.69,65.768 52.694,65.768 54.71,67.784 61.42,67.784 62.69,69.054 62.69,72.864 55.959,79.595 PORTC.7
  Bottom Layer w0.5: DS1307.5 48.006,84.328 50.834,81.5 58.626,81.5 66.754,73.372 66.754,67.403 R5.1 60.133,61.307 57.466,58.64 54.816,58.64 53.292,57.116 v1(53.292,54.576)
TXD: ATMEGA16.15 JP1.2 MAX232.11 PORTD.2 | length 171.3
  Top Layer w0.5: JP1.2 73.358,92.676 v1(89.106,76.928) ; ATMEGA16.15 43.64,47.21 44.148,46.702 PORTD.2 ; v1(60.15,39.59) 61.42,38.32 68.278,38.32 69.548,39.59 v1(69.548,45.178) ; MAX232.11 77.041,42.384 82.502,42.384 v1(84.026,43.908)
  Bottom Layer w0.5: ATMEGA16.15 53.165,39.59 v1(60.15,39.59) ; v1(69.548,45.178) 73.993,45.178 MAX232.11 MAX232.11@74.755,45.305 ; v1(84.026,43.908) 86.312,46.194 91.646,46.194 93.932,48.48 93.932,71.848 89.106,76.674 v1(89.106,76.928)
VCC: 5V.1 5V.2 5V.3 18B20.3 AMS1117.3 ATMEGA16.10 ATMEGA16.30 ATMEGA16.32 C2.2 C3.2 C6.2 C9.2 DHT11.1 DS1307.8 JTAG.2 LCD.2 LM7805.3 MAX232.16 ON.1 R2.2 R3.2 R4.1 R5.2 R6.2 R7.2 R8.1 VR.1 | length 461.1
  Top Layer w1: JTAG.2 9.985,29.049 14.684,24.35 25.098,24.35 ; 18B20.3 25.098,24.35 ; AMS1117.3 31.208,8.108 32.464,9.364 v1(32.464,12.666) R7.2 ; ATMEGA16.10 v1(30.94,43.146) v1(36.274,43.146) ; v1(36.02,82.262) 51.02,82.262 53.172,84.414 55.578,82.008 60.658,82.008 68.278,74.388 68.278,65.498 ; DHT11.1@41.735,21.302 DHT11.1 41.862,19.524 40.846,18.508 ; C3.2@46.053,8.475 C3.2 45.672,13.682 40.846,18.508 ; 53.419,84.167 53.419,84.661 55.626,86.868 DS1307.8 ; v1(60.658,64.482) 67.262,64.482 68.278,65.498 ; v1(76.914,65.498) 68.278,65.498 ; 25.098,24.35 v1(38.814,24.35) 38.814,20.54 40.846,18.508
  Bottom Layer w1: 3,72.61 5.476,72.61 5.567,72.701 14.593,72.701 14.85,72.444 LCD.2 ; 3,84.802 14.938,84.802 17.478,82.262 v1(36.02,82.262) ; 3.11,87.74 VR.1 ; R2.2 2.492,79.468 ; R4.1 6.302,94.996 ; R3.2 19.637,12.666 v1(32.464,12.666) 41.481,12.666 C3.2 ; R8.1 20.862,97.248 7.826,97.248 6.302,95.724 6.302,94.996 ; ATMEGA16.32 28.4,61.434 ; v1(30.94,43.146) 6.302,43.146 4.016,45.432 4.016,62.196 4.905,63.085 ; 32.972,61.434 28.4,61.434 ; ATMEGA16.30 33.48,61.18 35.385,59.275 C6.2 ; v1(36.274,43.146) 38.814,40.606 v1(38.814,24.35) ; 5V.1 42.243,3.395 43.005,4.157 43.005,6.062 ; 5V.2 42.878,5.935 43.005,6.062 ; 5V.3 43.005,8.475 ; LM7805.3@57.737,10.126 LM7805.3 51.768,9.745 C2.2 C3.2 ; LM7805.3@58.372,10.126 58.753,10.507 ON.1 ; R5.2 v1(60.658,64.482) 64.468,68.292 R6.2 ; MAX232.16 76.914,60.799 ; v1(76.914,65.498) 76.914,60.799 ; C9.2 81.867,52.671 83.01,53.814 83.01,59.656 81.867,60.799 76.914,60.799 ; 2.492,79.468 2.492,89.36 6.302,93.17 6.302,94.996 ; 2.492,79.468 2.492,65.498 4.905,63.085 ; 4.905,63.085 6.556,61.434 28.4,61.434 ; 43.005,6.062 43.005,8.475 ; 43.005,8.475 C3.2
XTAL1: ATMEGA16.13 Cx1.2 X1.2 | length 11.8
  Top Layer w0.5: ATMEGA16.13 38.56,51.909 X1.2 45.418,54.449 Cx1.2
XTAL2: ATMEGA16.12 Cx2.2 X1.1 | length 11.2
  Top Layer w0.5: Cx2.2 31.194,54.449 X1.1 ATMEGA16.12
pads on no net: AMS1117.4 DHT11.3 DS1307.7 JTAG.3 LCD.7 LCD.8 LCD.9 LCD.10 LCD.Hole_0 LCD.Hole_1 LCD.Hole_3 LCD.Hole_4 MAX232.7 MAX232.8 MAX232.9 MAX232.10 POWER.3 POWER.4 POWER.5 POWER.6 RS232.1 RS232.4 RS232.6 RS232.7 RS232.8 RS232.9 RS232.10 RS232.11

## Polygon pours and split planes (outlines as drawn)
GND on Bottom Layer "Bottom Layer-No Net" (solid, remove dead copper, pour order 4): 0.714,98.772 99.012,98.772 99.012,0.22 0.714,0.22
GND on Top Layer "Top Layer-No Net" (solid, remove dead copper, pour order 6): 0.714,98.772 98.504,98.772 99.274,98.002 99.274,0.22 0.714,0.22

## Keep-outs
Keep-Out Layer:
  the board outline again, w2

## Silkscreen, mask and mechanical layers (free items; w line width, h text height)
Top Overlay:
  text "RX" at 36.83,96.774 h1.2
  text "TX" at 39.624,96.774 h1.2
  text "3T GROUP  KTMT59" at 18.24,81.5 h2
  text "PA0" at 16.97,74.007 h1.2 r90
  text "PA1" at 19.51,74.007 h1.2 r90
  text "PA2" at 22.05,74.007 h1.2 r90
  text "PA3" at 24.59,74.007 h1.2 r90
  text "PA4" at 27.13,74.007 h1.2 r90
  text "PA5" at 29.67,74.007 h1.2 r90
  text "PA6" at 32.21,74.007 h1.2 r90
  text "PA7" at 35.004,74.007 h1.2 r90
  text "PC7" at 40.846,74.007 h1.2 r90
  text "PC6" at 43.64,74.007 h1.2 r90
  text "PC5" at 46.18,74.007 h1.2 r90
  text "PC4" at 48.72,74.007 h1.2 r90
  text "PC3" at 51.26,74.007 h1.2 r90
  text "PC2" at 53.8,74.007 h1.2 r90
  text "SDA" at 56.34,74.007 h1.2 r90
  text "SCL" at 58.88,74.007 h1.2 r90
  text "PB0" at 18.24,30.827 h1.2 r90
  text "PB1" at 20.78,30.827 h1.2 r90
  text "PB2" at 23.32,30.827 h1.2 r90
  text "PB3" at 25.86,30.827 h1.2 r90
  text "PB4" at 28.4,30.827 h1.2 r90
  text "MOSI" at 30.94,30.827 h1.2 r90
  text "MISO" at 33.48,30.827 h1.2 r90
  text "SCK" at 36.02,30.827 h1.2 r90
  text "RXD" at 42.37,30.827 h1.2 r90
  text "TXD" at 44.91,30.827 h1.2 r90
  text "PD2" at 47.45,30.827 h1.2 r90
  text "PD3" at 49.99,30.827 h1.2 r90
  text "PD4" at 52.53,30.827 h1.2 r90
  text "PD5" at 55.07,30.827 h1.2 r90
  text "PD6" at 57.61,30.827 h1.2 r90
  text "PD7" at 60.15,30.827 h1.2 r90

## Dimensions
0,0 to 0,99.28 on Mechanical 10
0,0 to 99.269,0 on Mechanical 10

## Text inside footprints (layer, text, board x,y; h text height)
AMS1117: Mechanical 1 "3" at 28.197,7.698 h1.2 r90; Mechanical 1 "2" at 28.197,5.493 h1.2 r90; Mechanical 1 "1" at 28.197,3.288 h1.2 r90
JTAG: Top Overlay "1" at 6.314,31.824 h1.52 r270; Top Overlay "2" at 9.35,32.478 h1.52 r270; Top Overlay "9" at 8.842,21.175 h1.52 r270; Top Overlay "10" at 8.867,17.467 h1.52 r270
LCD: Mechanical 1 "16" at 49.86,69.301 h1.2; Mechanical 1 "1" at 12.16,69.301 h1.2
RS232: Top Overlay "1" at 86.693,62.372 h1.02 r270; Top Overlay "5" at 86.693,46.624 h1.02 r270; Top Overlay "9" at 91.9,50.434 h1.02 r270; Top Overlay "6" at 91.9,58.816 h1.02 r270; Top Overlay "FEMALE" at 95.837,58.181 h1.52 r270